# EAGLE board rgb (EAGLE 7.2.0)
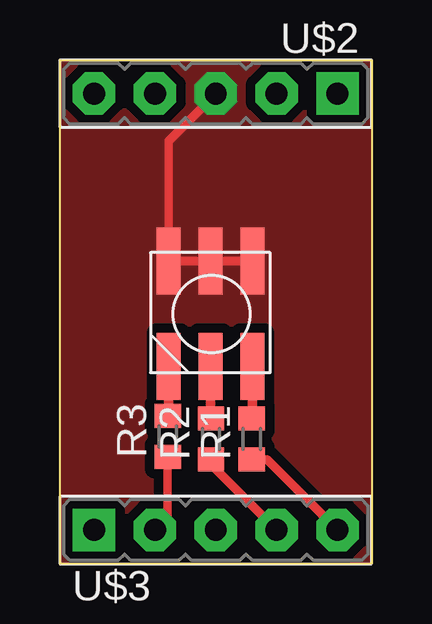
[diagram p0: board, top side]
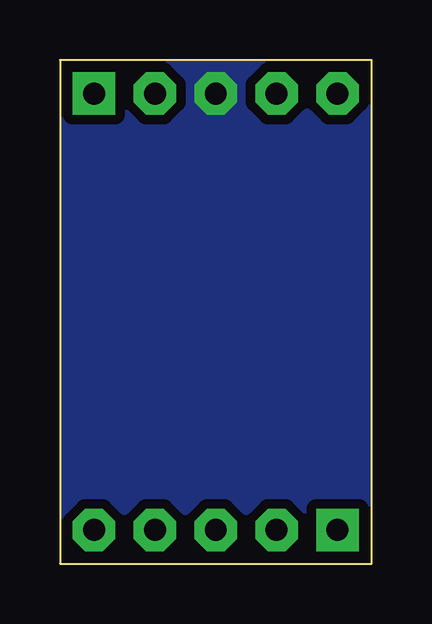
[diagram p1: board, bottom side, seen from below]

Size 13 x 21 mm. Coordinates in mm from the lower left corner, seen from the top.
Outline: 0,0 0,21 13,21 13,0 0,0
Copper layers (1*16): Top 0.035mm / dielectric 1.5mm / Bottom 0.035mm
Design rules "default *": minimum track width 10mil, minimum drill 24mil, track to track 8mil, track to pad 8mil, pad to pad 8mil, via to via 8mil, smd to smd 8mil, copper to edge 0mil, drill to drill 1mil, minimum pad ring 10mil, minimum via ring 8mil, stop-mask expansion 4mil, vias tented up to drill 0mil, thermal gap 10mil
Net classes: 0 default: clearance 0.205 mm

## Footprints (pad centres in the part's own frame; a part is rotated, then mirrored left to right if it is on the bottom)
R0603 = smd 1 x 1.1: 1 -0.85,0; 2 0.85,0
RGB_WW-FCE50TC-Q1 = smd 1 x 2.8: 1 -1.778,-2.286; 2 -0.028,-2.286; 3 1.722,-2.286; 4 -1.778,2.114; 5 -0.028,2.114; 6 1.722,2.114
JUMPER5M = drill 0.914 pad 1.778 square: 1 -5.08,0 | drill 0.914 pad 1.778 octagon: 2 -2.54,0; 3 0,0; 4 2.54,0; 5 5.08,0

## Placement (x,y rotation side)
R1  [R0603]  8,5.2 90 top
R2  [R0603]  6.3,5.2 90 top
R3  [R0603]  4.5,5.3 90 top
U$1  RGB_WW-FCE50TC-Q1  [RGB_WW-FCE50TC-Q1]  6.3,10.5 0 top
U$2  JUMPER5M  [JUMPER5M]  6.5,19.6 180 top
U$3  JUMPER5M  [JUMPER5M]  6.5,1.4 0 top

## Library data of the parts
R1-R3 = resistor
U$1-U$3 = !stavebnice03

## Nets
GND: U$1.4 U$1.5 U$1.6 U$2.3
N$1: R3.1 U$3.2
N$2: R1.2 U$1.3
N$3: R2.2 U$1.2
N$4: R3.2 U$1.1
N$5: R2.1 U$3.4
N$6: R1.1 U$3.5

## Tracks (layer width: path | path; a pad name or v marks a point on that pad's centre or on a via)
GND
  Top 0.356: U$2.3 4.52,17.62 U$1.4 U$1.6
  pour Top (isolate 0.406, rank 2, no thermals): 0.1,0.1 0.1,20.9 12.9,20.9 12.9,0.1
  pour Bottom (isolate 0.406, rank 2, no thermals): 0.1,0.1 0.1,20.9 12.9,20.9 12.9,0.1
N$1
  Top 0.356: R3.1 4.5,1.94 U$3.2
N$2
  Top 0.4: U$1.3 8.02,6.37 R1.2
N$3
  Top 0.4: U$1.2 6.27,6.58 R2.2
N$4
  Top 0.4: U$1.1 4.52,6.37 R3.2
N$5
  Top 0.356: R2.1 6.3,4.14 U$3.4
N$6
  Top 0.356: R1.1 8.63,4.35 U$3.5

## Text on the board
Top: II=I+I
Bottom: II=I+I
Dimension: rgb extension